# Altium PCB PCB2.PcbDoc
Units mm, origin at the board's own origin, x right, y up, seen from the top; angles counter-clockwise.
Board outline 73.79 x 51.94 mm, 2 copper layers (Top Layer, Bottom Layer); 19 components, 14 nets, 70 pads, 0 vias.
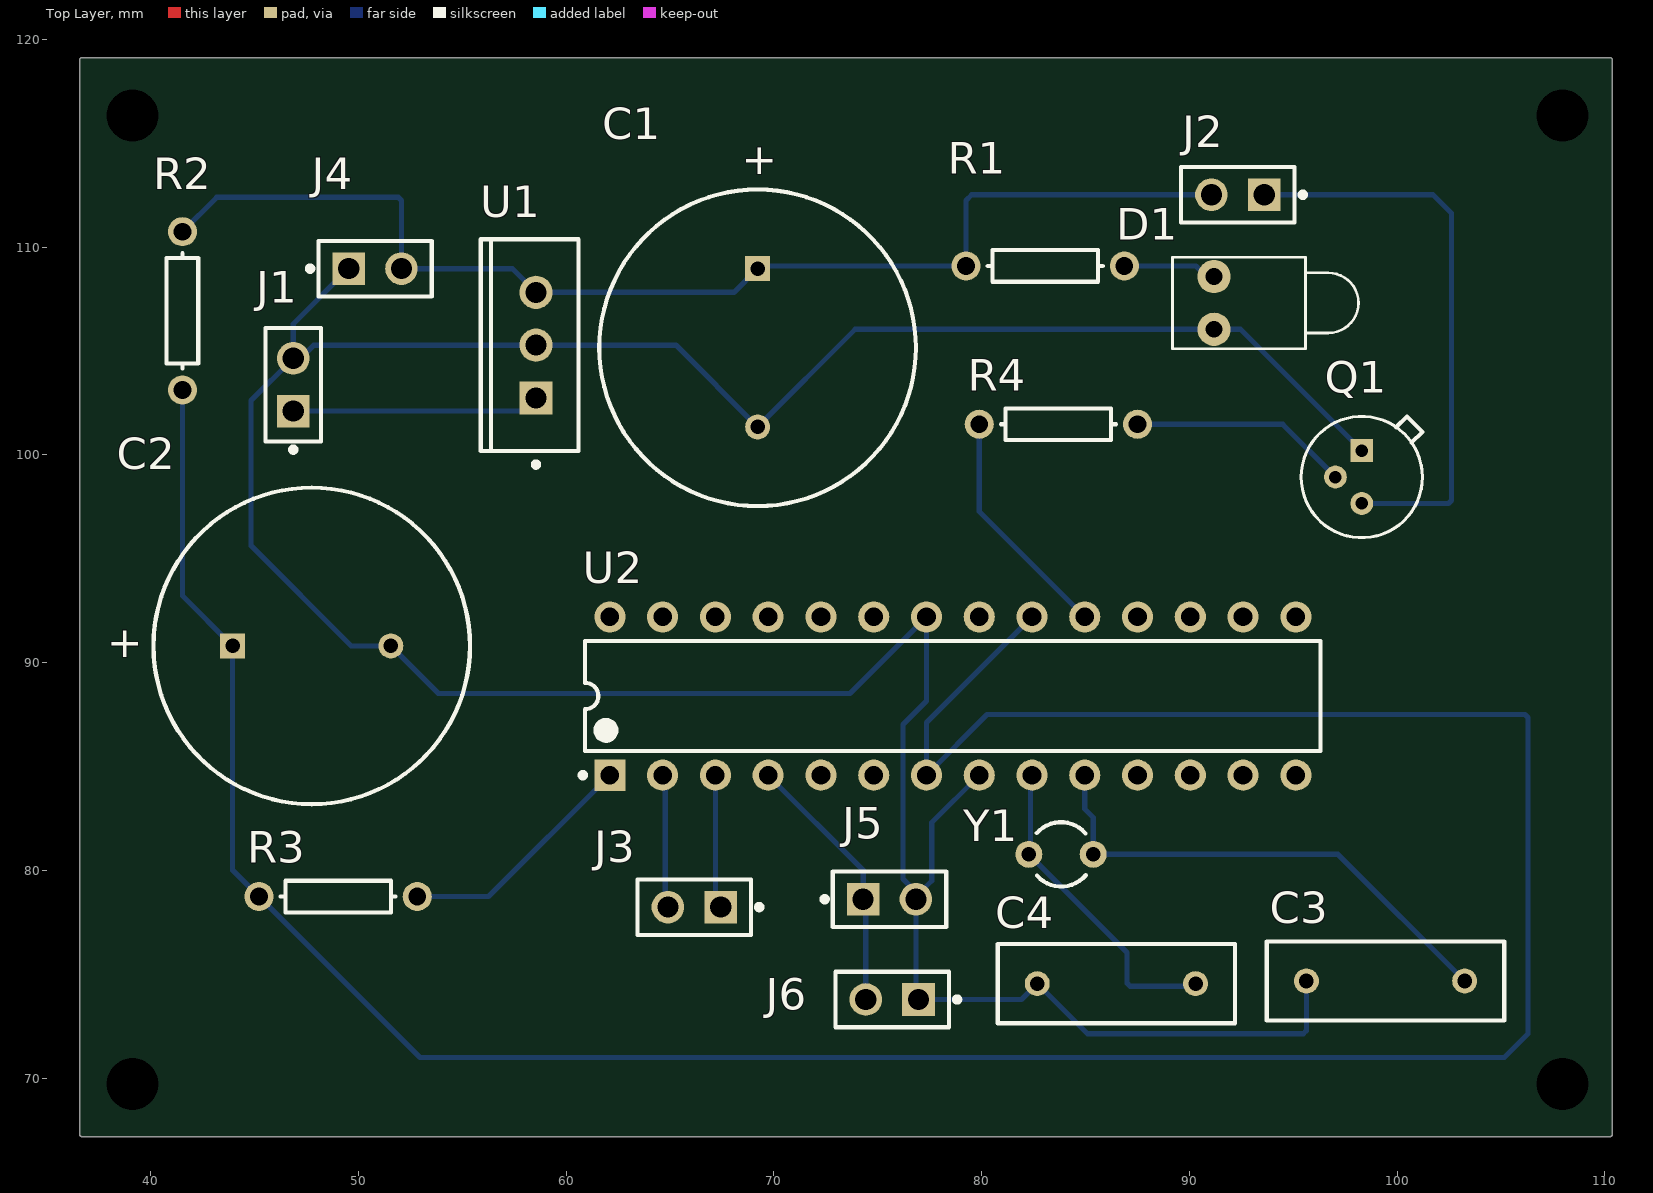
[diagram p0: Top Layer view]
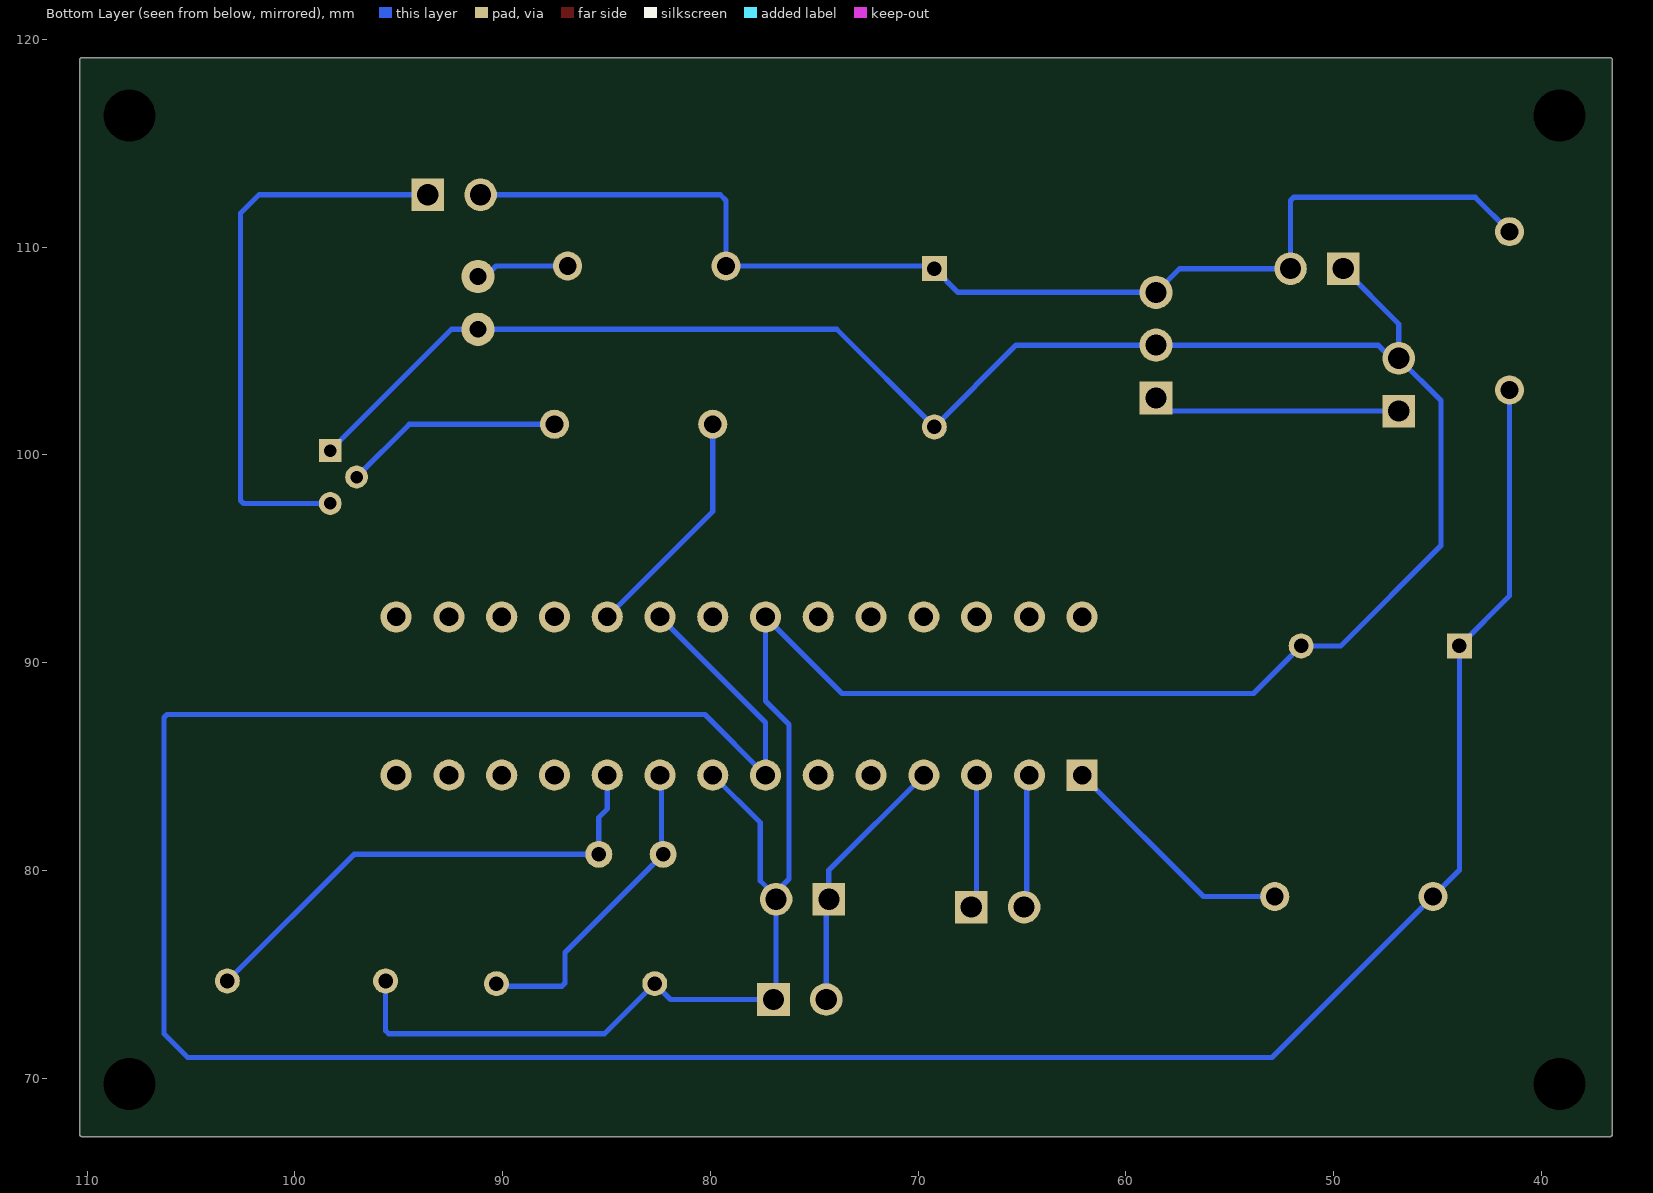
[diagram p1: Bottom Layer view, seen from below]

## Layer stack, top to bottom
Top Solder: solder mask 0.0102, Solder Resist, Dk 3.5
Top Layer: signal copper 0.0356
Dielectric 1: dielectric 0.32, FR-4, Dk 4.8
Bottom Layer: signal copper 0.0356
Bottom Solder: solder mask 0.0102, Solder Resist, Dk 3.5

## Board outline
36.703,67.183 cw(c36.703,67.31) 36.576,67.31 36.576,118.999 cw(c36.703,118.999) 36.703,119.126 110.236,119.126 cw(c110.236,118.999) 110.363,118.999 110.363,67.31 cw(c110.236,67.31) 110.236,67.183

## Design rules (kind name [scope] priority, off if disabled: settings)
BoardOutlineClearance [All] p1: gap=0.2 ignorepadtopadclearanceinfootprint=FALSE
Clearance [All] p1: gap=0.127 ignorepadtopadclearanceinfootprint=FALSE except(0.25: Arc-Hole Track-Hole SMDPad-Hole THPad-Hole Via-Hole Fill-Hole Poly-Hole Region-Hole Text-Hole)
ComponentClearance [All] p1: gap=0.127 collisioncheckmode=3 verticalgap=0.127 showdistances=TRUE
DiffPairsRouting [All] p1: maxlimit=0.254 minlimit=0.127 mostfreqgap=0.127 toplayer_minwidth=0.127 toplayer_maxwidth=25.4 toplayer_prefwidth=0.127 bottomlayer_minwidth=0.127 bottomlayer_maxwidth=25.4 bottomlayer_prefwidth=0.127 maxuncoupledlength=12.7
Height [All] p1: minheight=0 maxheight=1816.048 prefheight=12.7
HoleSize [All] p1: absolutevalues=TRUE maxlimit=6.3 minlimit=0.3 maxpercent=80.000 minpercent=20.000
HoleToHoleClearance [All] p1: gap=0.25 allowstackedmicrovias=FALSE
MinimumAnnularRing [All] p1: minimumring=0.076
MinimumSolderMaskSliver [All] p1: minsoldermaskwidth=0
PlaneClearance [All] p1: clearance=0.127
PlaneConnect PlaneConnectPowerPads [InPadClass('PowerPads')] p1: planeconnectstyle=Direct reliefexpansion=0.508 reliefentries=4 reliefconductorwidth=0.254 reliefairgap=0.254
PlaneConnect [All] p2: pad.planeconnectstyle=Relief pad.reliefexpansion=0.3 pad.reliefentries=4 pad.reliefconductorwidth=0.127 pad.reliefairgap=0.127 via.planeconnectstyle=Direct via.reliefexpansion=0.3 via.reliefentries=4 via.reliefconductorwidth=0.127 via.reliefairgap=0.127
PolygonConnect PolygonConnectPowerPads [All vs (InPadClass('PowerPads'))] p1: connectstyle=Direct reliefconductorwidth=0.254 reliefentries=4 polygonreliefangle="90 Angle" airgapwidth=0.254
PolygonConnect [All] p2: thpad.connectstyle=Relief thpad.reliefconductorwidth=0.127 thpad.reliefentries=4 thpad.polygonreliefangle="90 Angle" thpad.airgapwidth=0.127 smdpad.connectstyle=Relief smdpad.reliefconductorwidth=0.127 smdpad.reliefentries=4 smdpad.polygonreliefangle="90 Angle" smdpad.airgapwidth=0.127 via.connectstyle=Direct via.reliefconductorwidth=0.127 via.reliefentries=4 via.polygonreliefangle="90 Angle" via.airgapwidth=0.127
RoutingVias [All] p1: holewidth=0.3 width=0.6 viastyle="Through Hole" minholewidth=0.3 minwidth=0.6 maxholewidth=0.6 maxwidth=6.6
SilkToSilkClearance [All] p1: silktosilkclearance=0
SilkToSolderMaskClearance [IsPad] p1: minsilkscreentomaskgap=0.127 clearancetoexposedcopper=TRUE
SolderMaskExpansion [All] p1: expansion=0.075 istentingtop=FALSE
Width [All] p1: maxlimit=25.4 minlimit=0.127 preferedwidth=0.127 minimp=50.000000 maximp=50.000000 favimp=50.000000
20 further rules are at their usual default settings.

## Components (designator, comment, footprint, x,y, rotation, side; value= is the part's Value field where it differs from the comment)
C1 "Cap Pol1" RB7.6-15 69.215,105.156 r90 top value=100pF
C2 "Cap Pol1" RB7.6-15 47.752,90.805 r180 top value=100pF
C3 "Cap" RAD-0.3 99.441,74.676 r0 top value=100pF
C4 "Cap" RAD-0.3 86.487,74.549 r0 top value=100pF
D1 "LED1" LED-1 91.186,107.315 r0 top
J1 "TSW-102-07-L-S" FP-TSW-102-07-L-S-MFG 46.863,103.378 r90 top
J2 "TSW-102-07-L-S" FP-TSW-102-07-L-S-MFG 92.329,112.522 r180 top
J3 "TSW-102-07-L-S" FP-TSW-102-07-L-S-MFG 66.167,78.232 r180 top
J4 "TSW-102-07-L-S" FP-TSW-102-07-L-S-MFG 50.8,108.966 r0 top
J5 "TSW-102-07-L-S" FP-TSW-102-07-L-S-MFG 75.565,78.613 r0 top
J6 "TSW-102-07-L-S" FP-TSW-102-07-L-S-MFG 75.692,73.787 r180 top
Q1 "2N2222A" FP-2N2222A-MFG 98.298,98.933 r90 top
R1 "Res1" AXIAL-0.3 83.058,109.093 r0 top value=1K
R2 "Res1" AXIAL-0.3 41.529,106.934 r270 top value=1K
R3 "Res1" AXIAL-0.3 49.022,78.74 r180 top value=1K
R4 "Res1" AXIAL-0.3 83.693,101.473 r0 top value=1K
U1 "LM7805CT" FAIR-TO-220-3 58.547,105.283 r180 top
U2 "ATmega328P-PU" 28P3 78.613,88.392 r90 top
Y1 "XTAL" R38 83.82,80.772 r90 top

## Footprints (in the part's own frame and the unit in brackets; to place one, negate y for a bottom-side part, rotate by r counter-clockwise, add the part's x,y. Pads: shape width x height; smd on the part's side, far side on the other; paste and mask are expansions set on the pad)
28P3 [mm] "28-Pin Plastic Dual In-Line Package (PDIP)"
  rect 1.5x1.5 hole 0.9: 1(-3.81,16.51)
  round 1.5 hole 0.9: 2(-3.81,13.97) 3(-3.81,11.43) 4(-3.81,8.89) 5(-3.81,6.35) 6(-3.81,3.81) 7(-3.81,1.27) 8(-3.81,-1.27) 9(-3.81,-3.81) 10(-3.81,-6.35) 11(-3.81,-8.89) 12(-3.81,-11.43) 13(-3.81,-13.97) 14(-3.81,-16.51) 15(3.81,-16.51) 16(3.81,-13.97) 17(3.81,-11.43) 18(3.81,-8.89) 19(3.81,-6.35) 20(3.81,-3.81) 21(3.81,-1.27) 22(3.81,1.27) 23(3.81,3.81) 24(3.81,6.35) 25(3.81,8.89) 26(3.81,11.43) 27(3.81,13.97) 28(3.81,16.51)
  silkscreen extent -3.93,-17.7 2.65,17.93, body extent -3.6,-17.65 3.6,17.65, height 4.58
AXIAL-0.3 [mm] "Axial Device, Thru-Hole; 2 Leads; 0.3 in Pin Spacing"
  round 1.4 hole 0.85: 1(-3.81,0) 2(3.81,0)
  silkscreen extent -2.77,-0.76 2.77,0.76
FAIR-TO-220-3 [mm] "FM, 3-Leads, Body 10.2x4.7mm, Pitch 2.54mm"
  rect 1.6x1.6 hole 1: 1(0,2.54)
  round 1.6 hole 1: 2(0,0) 3(0,-2.54)
  silkscreen extent -2.04,-5.1 2.66,5.87, body extent -2.04,-5.1 2.66,5.1, height 18.95
FP-2N2222A-MFG [mm]
  rect 1.1x1.1 hole 0.6 paste-1000 mask+0: 1(1.27,0)
  round 1.1 hole 0.6 paste-1000 mask+0: 2(0,1.27) 3(-1.27,0)
  silkscreen extent -2.92,-2.92 2.92,2.92, body extent -3.02,-3.02 3.02,3.02, height 0.25
FP-TSW-102-07-L-S-MFG [mm]
  rect 1.57x1.57 hole 1.02 paste-1000 mask+0: 1(-1.27,0)
  round 1.57 hole 1.02 paste-1000 mask+0: 2(1.27,0)
  silkscreen extent -3.25,-1.34 2.73,1.34, body extent -2.83,-1.44 2.83,1.44, height 0.25
LED-1 [mm] "LED; 2 Leads"
  round 1.6 hole 0.8: 1(0,1.27) 2(0,-1.27)
  silkscreen extent -2,-2.2 6.95,2.2
R38 [mm] "Crystal, Thru-Hole; 2 Leads; Body 3.1 x 8.2 mm (Dia.xH)"
  round 1.3 hole 0.7: 1(0,1.55) 2(0,-1.55)
  silkscreen extent -1.55,-1.19 1.55,1.17
RAD-0.3 [mm] "Radial Cap, Thru-Hole; 2 Leads; 0.3 in Pin Spacing"
  round 1.2 hole 0.7: 1(-3.81,0) 2(3.81,0)
  silkscreen extent -5.71,-1.91 5.71,1.91
RB7.6-15 [mm] "Polarized Capacitor (Radial); 2 Leads"
  rect 1.2x1.2 hole 0.7: 1(3.81,0)
  round 1.2 hole 0.7: 2(-3.81,0)
  silkscreen extent -7.62,-7.62 7.62,7.62

## Part data
C1 C2: "Polarized Capacitor (Radial)", LatestRevisionDate=17-Jul-2002, LatestRevisionNote="Re-released for DXP Platform.", PackageDescription="Polarized Capacitor (Radial); 2 Leads", PackageReference=RB7.6-15, Published=8-Jun-2000, Publisher="Altium Limited"
C3 C4: "Capacitor", LatestRevisionDate=17-Jul-2002, LatestRevisionNote="Re-released for DXP Platform.", PackageDescription="Radial Cap, Thru-Hole; 2 Leads; 0.3 in Pin Spacing", PackageReference=RAD-0.3, Published=8-Jun-2000, Publisher="Altium Limited"
D1: "Typical RED GaAs LED", LatestRevisionDate=08-Jul-2005, LatestRevisionNote="Mech Layer 1 removed.", PackageDescription="LED; 2 Leads", PackageReference=LED-1, Published=8-Jun-2000, Publisher="Altium Limited"
J1 J2 J3 J4 J5 J6: library part CMP-02766-001428-1, "CONN HEADER VERT 2POS 2.54MM", Color=Black, Current Rating=7.6A, Max Operating Temperature=125°C, Max Voltage Rating (AC)=550V, Min Operating Temperature=-55°C, Package Quantity=1, Connector Type="Male Pin", Contact Material=Bronze, Contact Mating Length=0.23inch, Contact Plating=Gold, Contact Type="Male Pin", Depth=2.54mm, Gender=Male, Housing Color=Black, Housing Material=Polyester, Lead Free="Lead Free", Length=5.08mm, Max Current Rating=7.6A, Mount="Through Hole", Number of Contacts=2, Number of Positions=2, Number of Rows=1, Orientation=Straight, Packaging=Bulk, Pitch=2.54mm, Radiation Hardening=No, REACH SVHC="No SVHC", RoHS Compliant=Yes, Series=TSW, Termination=Solder, Voltage Rating=550V, Width=2.54mm
Q1: library part CMP-50385-000001-1, "T-NPN SI- AUDIO VHF AMP", Case/Package=TO-18, Collector Emitter Breakdown Voltage=40V, Max Operating Temperature=200°C, Max Power Dissipation=1.2W, Transition Frequency=300MHz, Collector Emitter Voltage (VCEO)=40V, Lead Free="Contains Lead", Number of Pins=3, Polarity=NPN, REACH SVHC="No SVHC"
R1 R2 R3 R4: "Resistor", LatestRevisionDate=17-Jul-2002, LatestRevisionNote="Re-released for DXP Platform.", PackageDescription="Axial Device, Thru-Hole; 2 Leads; 0.3 in Pin Spacing", PackageReference=AXIAL-0.3, Published=8-Jun-2000, Publisher="Altium Limited"
U1: library part CMP-2000-04938-1, "Positive Voltage Regulator, 5 V, 1 A, -40 to 125 degC, 3-Pin TO-220, RoHS, Tube", Manufacturer=FairchildSemiconductor, Maximum Input Voltage=35V, Maximum Output Current=2.2(Typ)A, Maximum Quiescent Current=8mA, Operating Temperature=-40to125degC, Output Voltage=5V, Package=3TO-220AB, Package Description="3-Pin Through Hole Device, Body 10 x 4.5 mm, Pitch 2.54 mm", Package Reference=TO-220, Typical Dropout Voltage @ Current=2@1AV, Accuracy=±4%, Category=LinearRegulator, Datasheet URL=https://datasheet.ciiva.com/26904/lm7805ct-26904988.pdf, Datasheet Version=Aug-12, Line Regulation=100mV, Load Regulation=100mV, Manufacturer URL=https://www.fairchildsemi.com/, Mounting=ThroughHole, Number of Outputs=1, Output Type=Fixed, Package URL=https://www.fairchildsemi.com/package-drawings/TO/TO220B03.pdf, Packaging=Rail/Tube, Polarity=Positive, Rad Hard=No, Type=Linear
U2: library part CMP-0095-00013-2, "8-bit AVR Microcontroller, 32KB Flash, 1KB EEPROM, 2KB SRAM, 28-pin PDIP, Industrial Grade (-40°C to 85°C)", ComponentLink1Description="Manufacturer URL", ComponentLink1URL=http://www.atmel.com/, ComponentLink2Description="ATmega48A/48PA/88A/88PA/168A/168PA/328/328P Datasheet", ComponentLink2URL=http://www.atmel.com/dyn/resources/prod_documents/8271.pdf, ComponentLink3Description="ATmega48A/48PA/88A/88PA/168A/168PA/328/328P Summary", ComponentLink3URL=http://www.atmel.com/dyn/resources/prod_documents/8271S.pdf, DatasheetVersion="revD, May-2011", PackageDescription="28-lead (0.300\"/7.62mm Wide) Plastic Dual Inline Package (PDIP)", PackageReference=28P3, PackageVersion="revB, Sep-2001", RevisionNote="DatasheetVersion updated. URLs added."
Y1: "Crystal Oscillator", LatestRevisionDate=17-Jul-2002, LatestRevisionNote="Re-released for DXP Platform.", PackageDescription="Crystal, Thru-Hole; 2 Leads; Body 3.1 x 8.2 mm (Dia.xH)", PackageReference=R38, Published=8-Jun-2000, Publisher="Altium Limited"

## Free pads (board coordinates)
  round 1.524 hole 2.5: 1(39.116,116.332) 2(107.95,116.332) 3(39.116,69.723) 4(107.95,69.723)

## Nets (pads, with @x,y where several pads share a name; then routed paths per layer and width w, separated by ;. In a path a pad name is that pad's centre, name@x,y a point inside that pad or via, vN(x,y) a via of type N, cw(c..) or ccw(c..) an arc to the next point about the centre after c; other vN are vias at no path point)
NetC1_1: C1.1 J2.2 J4.2 R1.1 R2.1 U1.3 | length 57.8
  Top Layer w0.254: C1.1 C1.1@69.342,109.093
  Bottom Layer w0.254: R2.1 43.18,112.395 51.921,112.395 52.07,112.246 J4.2 57.404,108.966 U1.3 68.072,107.823 C1.1 ; C1.1@69.342,109.093 R1.1 79.248,112.246 79.524,112.522 J2.2
NetC1_2: C1.2 C2.2 C3.1 C4.1 D1.2 J1.2 J4.1 J5.2 J6.1 Q1.1 U1.2 U2.8 U2.22 | length 158.7
  Top Layer w0.254: J1.2 J1.2@47.219,104.648 ; J6.1@76.835,73.914 J6.1 ; J5.2 76.835,78.738 J5.2@76.835,78.969
  Bottom Layer w0.254: J1.2@47.219,104.648 47.854,105.283 U1.2 65.278,105.283 C1.2 73.914,106.045 D1.2 92.456,106.045 Q1.1 ; J4.1 46.863,106.299 J1.2 44.831,102.616 44.831,95.631 49.657,90.805 C2.2 53.848,88.519 73.66,88.519 U2.22 77.343,88.148 76.212,87.017 76.212,79.592 J5.2@76.835,78.969 ; J6.1@76.835,73.914 J5.2 ; J5.2@76.835,78.738 77.597,79.5 77.597,82.296 U2.8 ; J6.1 81.915,73.787 C4.1 85.09,72.136 95.482,72.136 95.631,72.285 C3.1
NetC2_1: C2.1 R2.2 R3.2 U2.7 U2.20 | length 145.8
  Bottom Layer w0.254: R2.2 41.529,93.218 C2.1 43.942,80.01 R3.2 52.959,70.993 105.156,70.993 106.299,72.136 106.299,87.354 106.15,87.503 80.264,87.503 U2.7 77.343,87.122 U2.20
NetC3_2: C3.2 U2.10 Y1.2 | length 24.4
  Bottom Layer w0.254: U2.10 84.963,82.954 85.37,82.547 Y1.2 97.155,80.772 C3.2
NetC4_2: C4.2 U2.9 Y1.1 | length 15.4
  Top Layer w0.254: Y1.1 Y1.1@82.347,80.848 ; U2.9@82.347,84.506 U2.9 ; C4.2@90.17,74.422 C4.2
  Bottom Layer w0.254: Y1.1 86.995,76.047 86.995,74.571 87.144,74.422 C4.2@90.17,74.422 ; Y1.1@82.347,80.848 U2.9@82.347,84.506
NetD1_1: D1.1 R1.2 | length 4.5
  Top Layer w0.254: D1.1@90.822,108.585 D1.1
  Bottom Layer w0.254: R1.2 90.314,109.093 D1.1@90.822,108.585
NetJ1_1: J1.1 U1.1 | length 11.9
  Top Layer w0.254: U1.1@57.912,102.108 U1.1
  Bottom Layer w0.254: J1.1 U1.1@57.912,102.108
NetJ2_1: J2.1 Q1.3 | length 27.6
  Bottom Layer w0.254: J2.1 101.727,112.522 102.616,111.633 102.616,97.812 102.467,97.663 Q1.3
NetJ3_1: J3.1 U2.3 | length 6.5
  Top Layer w0.254: J3.1@67.183,78.486 J3.1
  Bottom Layer w0.254: J3.1@67.183,78.486 U2.3
NetJ3_2: J3.2 U2.2 | length 6.5
  Top Layer w0.254: U2.2 U2.2@64.77,84.455 ; J3.2@64.77,78.359 J3.2
  Bottom Layer w0.254: J3.2@64.77,78.359 U2.2@64.77,84.455
NetJ5_1: J5.1 J6.2 U2.4 | length 12.7
  Top Layer w0.254: J5.1 J5.1@74.422,78.486
  Bottom Layer w0.254: U2.4 74.295,80.01 J5.1 ; J6.2 J5.1@74.422,78.486
NetQ1_2: Q1.2 R4.2 | length 10.6
  Bottom Layer w0.254: R4.2 94.488,101.473 Q1.2
NetR3_1: R3.1 U2.1 | length 11.7
  Bottom Layer w0.254: R3.1 56.261,78.74 U2.1
NetR4_1: R4.1 U2.19 | length 11.4
  Bottom Layer w0.254: R4.1 79.883,97.282 U2.19
pads on no net: U2.5 U2.6 U2.11 U2.12 U2.13 U2.14 U2.15 U2.16 U2.17 U2.18 U2.21 U2.23 U2.24 U2.25 U2.26 U2.27 U2.28

## Text inside footprints (layer, text, board x,y; h text height)
C1: Top Overlay "+" at 69.952,113.288 h1.5 r90
C2: Top Overlay "+" at 39.62,91.542 h1.5 r180